# Allegro board PCB_3.brd
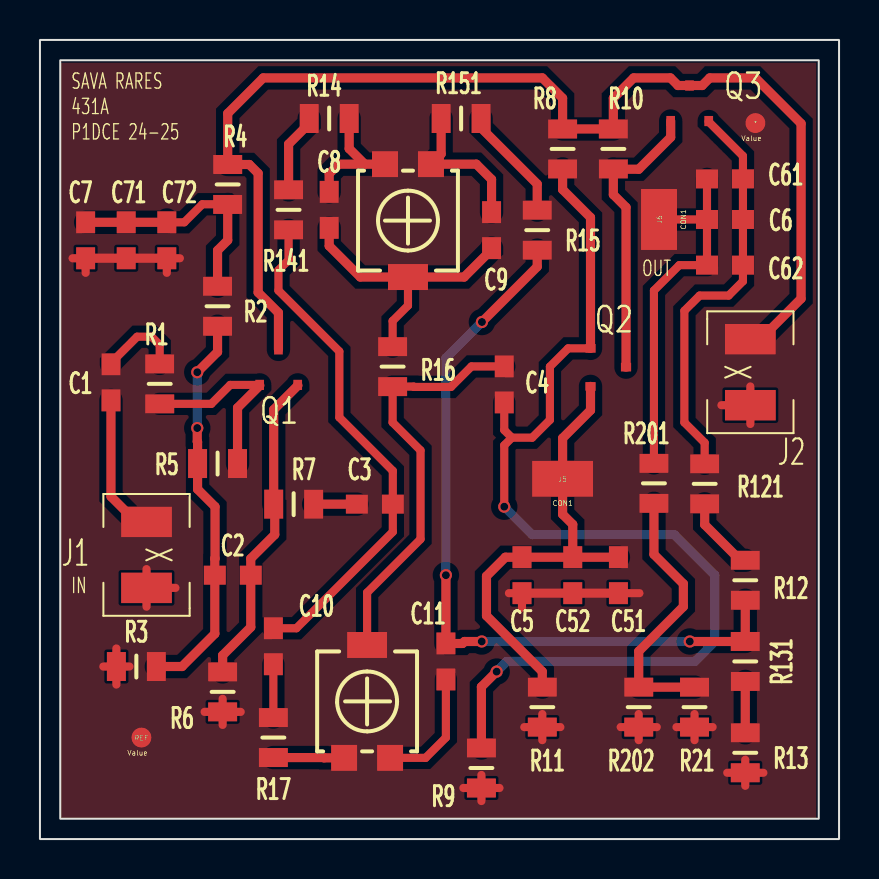
[diagram p0: board, top side]
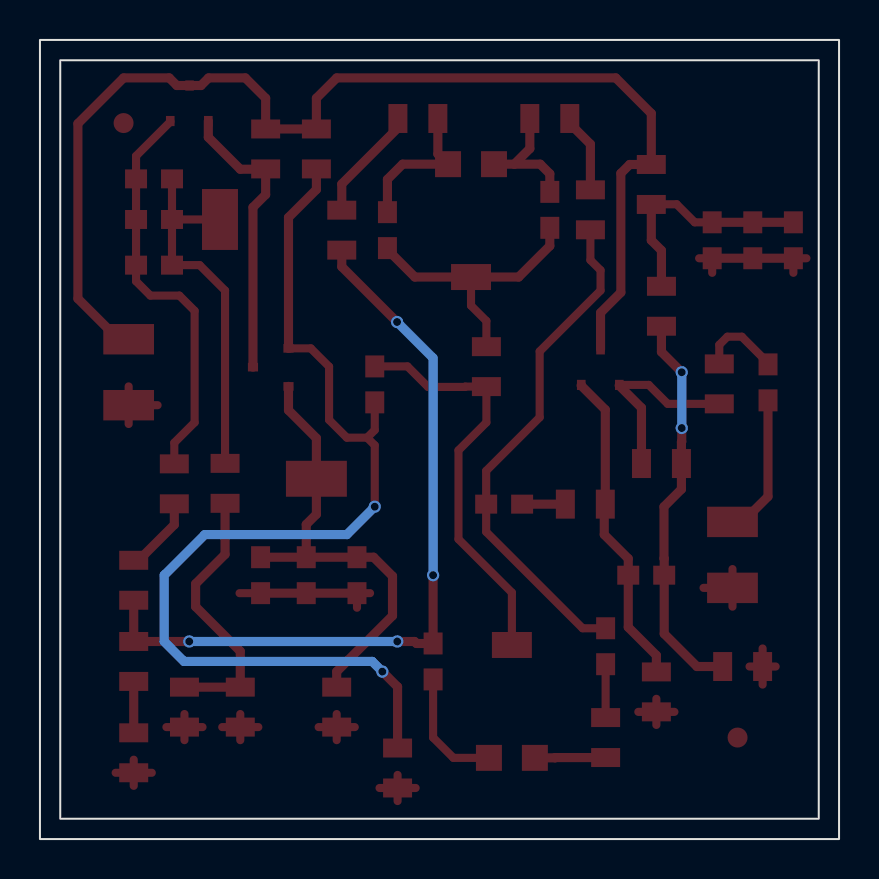
[diagram p1: board, bottom side, seen from below]

Outline 40 x 40 mm; copper layers: TOP, BOTTOM. Coordinates in mm from the lower left corner of the outline.
Outline path: rectangle 0,0 40,40 ; rectangle 1.02,1.02 38.98,38.98

## Design rules (mm)
nets with their own width: min track width 0.406; nets 0 N56090 N56126 N56242 N56314 N56322 N56482 N56488 N56498 N56510 N56530 N56568 N56596 N56804 N56814 N56820 N56830 N56910 N56918 N57098 N57226 N57232 N57238 N59984 N563521 N564261 N568981 N569300

## Placement (name value [footprint] x y rotation side)
C1  100n  [CAPC2008X126N_0805]  3.56 22.86 90 top
C2  4.7u  [CAPC2008X126N_0805]  9.65 13.21 0 top
C3  4.7u  [CAPC2008X126N_0805]  16.76 16.76 0 top
C4  1u  [CAPC2008X126N_0805]  23.24 22.76 270 top
C5  4.7u  [CAPC2008X126N_0805]  24.13 13.21 90 top
C6  4.7u  [CAPC2008X126N_0805]  34.29 31.01 0 top
C7  4.7u  [CAPC2008X126N_0805]  2.29 29.97 270 top
C8  33n  [CAPC2008X126N_0805]  14.48 31.5 270 top
C9  33n  [CAPC2008X126N_0805]  22.61 30.48 90 top
C10  2.2n  [CAPC2008X126N_0805]  11.68 9.65 270 top
C11  2.2n  [CAPC2008X126N_0805]  20.32 8.89 90 top
C51  2.2u  [CAPC2008X126N_0805]  28.96 13.21 90 top
C52  4.7u  [CAPC2008X126N_0805]  26.67 13.21 90 top
C61  4.7u  [CAPC2008X126N_0805]  34.29 33.05 0 top
C62  2.2u  [CAPC2008X126N_0805]  34.29 28.73 0 top
C71  4.7u  [CAPC2008X126N_0805]  4.32 29.97 270 top
C72  4.7u  [CAPC2008X126N_0805]  6.35 29.97 270 top
J1  CON2  [1210RF_WV_12D]  5.33 14.22 270 top
J2  CON2  [1210RF_WV_12D]  35.56 23.37 90 top
J5  CON1  [SMD_PAD_3-05_1-80]  26.16 18.03 0 top
J6  CON1  [SMD_PAD_3-05_1-80]  30.99 31.01 90 top
NOREF  -  [unnamed]  5.08 5.08 0 top
NOREF#2  -  [unnamed]  35.81 35.84 0 top
Q1  QBC846B  [SOT23]  11.94 23.62 90 top
Q2  QBC846B  [SOT23]  28.45 23.62 0 top
Q3  QBC846B  [SOT23]  32.51 36.83 90 top
R1  1k  [RES2012X50N_0805]  5.99 22.78 270 top
R2  100k  [RES2012X50N_0805]  8.89 26.67 90 top
R3  150k  [RES2012X50N_0805]  4.83 8.64 0 top
R4  22k  [RES2012X50N_0805]  9.4 32.77 270 top
R5  100k  [RES2012X50N_0805]  8.89 18.8 180 top
R6  5.6k  [RES2012X50N_0805]  9.14 7.37 270 top
R7  330  [RES2012X50N_0805]  12.7 16.76 0 top
R8  1Meg  [RES2012X50N_0805]  26.16 34.54 90 top
R9  180k  [RES2012X50N_0805]  22.1 3.56 90 top
R10  100k  [RES2012X50N_0805]  28.7 34.54 90 top
R11  22k  [RES2012X50N_0805]  25.15 6.6 90 top
R12  6.8k  [RES2012X50N_0805]  35.31 12.95 90 top
R13  2k  [RES2012X50N_0805]  35.31 4.32 90 top
R14  22k  [RES2012X50N_0805]  14.48 36.07 180 top
R15  10k  [RES2012X50N_0805]  24.89 30.48 90 top
R16  22k  [RES2012X50N_0805]  17.65 23.65 270 top
R17  2.2k  [RES2012X50N_0805]  11.68 5.08 270 top
R18  100K  [TS53YL]  17.27 33.78 90 top
R19  100K  [TS53YL]  17.53 4.06 270 top
R21  10Meg  [RES2012X50N_0805]  32.77 6.6 90 top
R121  510  [RES2012X50N_0805]  33.27 17.78 90 top
R131  330  [RES2012X50N_0805]  35.31 8.89 90 top
R141  10k  [RES2012X50N_0805]  12.45 31.5 270 top
R151  22k  [RES2012X50N_0805]  21.08 36.07 180 top
R201  510  [RES2012X50N_0805]  30.73 17.81 90 top
R202  510  [RES2012X50N_0805]  29.97 6.6 90 top

## Library data of the parts
C1-C11 C51 C52 C61 C62 C71 C72 = C
J1 J2 = CON2
J5 J6 = CON1
Q1 = QBC846B_0
Q2 = QBC846B_1
Q3 = QBC846B_2
R1-R17 R21 R121 R131 R141 R151 R201 R202 = R
R18 R19 = POT

## Footprints (pads in the part's own frame, mm; a bottom-side part is the same pattern mirrored in y, then rotated)
1210RF_WV_12D
  rect 1.524x2.54 smd: 1(-1.651,0) 2(1.651,0)
CAPC2008X126N_0805
  rect 1.1x0.95 smd: 1(-0.9,0) 2(0.9,0)
RES2012X50N_0805
  rect 0.95x1.45 smd: 1(-1,0) 2(1,0)
SMD_PAD_3-05_1-80
  rect 3.05x1.8 smd: 1(0,0)
SOT23
  rect 0.508x0.432 smd: 1(-0.889,0.94) 2(-0.889,-0.965) 3(0.889,0)
TS53YL
  rect 1.3x1.3 smd: 1(0,0) 3(0,-2.3)
  rect 1.3x2 smd: 2(-5.65,-1.15)
unnamed
  round 1 smd: 1(0,0)

## Nets
0: C5.1 C7.2 C51.1 C52.1 C71.2 C72.2 J1.2 J2.1 R3.1 R6.2 R9.1 R11.1 R13.1 R21.1 R202.1
N56090: C7.1 C71.1 C72.1 R2.2 R4.2
N56126: J2.2 Q1.3 Q3.3 R4.1 R8.2 R10.2
N56242: Q2.3 Q3.1 R10.1
N56314: C6.2 C61.2 C62.2 Q3.2(E) R121.2
N56322: C6.1 C61.1 C62.1 J6.1 R201.2
N56482: C3.2 C10.1 R141.2
N56488: C8.1 R14.1 R18.1
N56498: C9.2 R18.3 R151.2
N56510: C11.2 R12.1 R15.1 R131.2
N56530: C4.2 Q2.1 R8.1 R9.2
N56568: C8.2 C9.1 R16.1 R18.2(T)
N56596: C2.1 R2.1 R3.2 R5.2
N56804: C1.1 J1.1
N56814: C1.2 R1.1
N56820: Q1.1 R1.2 R5.1
N56830: C4.1 R16.2 R19.2(T)
N56910: C2.2 Q1.2(E) R6.1 R7.1
N56918: C5.2 C51.2 C52.2 J5.1 Q2.2(E) R11.2
N57098: R21.2 R201.1 R202.2
N57226: C10.2 R17.1
N57232: R17.2 R19.3
N57238: C11.1 R19.1
N59984: R13.2 R131.1
N563521: R14.2 R141.1
N564261: R15.2 R151.1
N568981: R12.2 R121.1
N569300: C3.1 R7.2

Pads without a net: NOREF 1; NOREF#2 1

## Via types
v1: diameter 0.61, hole 0.4, TOP to BOTTOM, 8 vias

## Routing (per net, layer and track width the routed paths; a pad name or vN(x,y) marks a point on that pad's centre or on a via; arc(x,y) is an arc through that point)
0: length 44.3
  TOP w0.406: J2.1 35.56,22.66 ; J2.1 34.11,21.72 ; J2.1 35.56,20.78 ; R11.1 26.05,5.6 ; R11.1 25.15,6.26 ; R11.1 24.24,5.6 ; R11.1 25.15,4.95 ; 3.83,7.73 R3.1 ; R3.1 3.83,9.54 ; R3.1 4.48,8.64 ; R3.1 3.17,8.64 ; R9.1 23,2.56 ; R9.1 22.1,1.9 ; R9.1 21.19,2.56 ; R9.1 22.1,3.21 ; 35.31,2.66 R13.1 ; R13.1 36.21,3.32 ; R13.1 34.4,3.32 ; R13.1 35.31,3.97 ; 23.48,12.31 C5.1 24.13,11.58 ; J1.2 6.78,12.57 ; J1.2 5.33,13.51 ; J1.2 5.33,11.63 ; 6.35,28.34 C72.2 7,29.07 ; 1.63,29.07 C7.2 2.29,28.34 ; 29.97,4.95 R202.1 ; R202.1 30.88,5.6 ; R202.1 29.07,5.6 ; R202.1 29.97,6.26 ; R21.1 33.67,5.6 ; R21.1 32.77,4.95 ; R21.1 32.77,6.26 ; R21.1 31.86,5.6 ; 4.45,12.57 4.83,12.57 ; R6.2 10.05,6.37 ; R6.2 8.24,6.37 ; R6.2 9.14,7.02 ; R6.2 9.14,5.71 ; C51.1 30.01,12.31
  TOP w0.457: 4.83,12.57 J1.2 ; C7.2 C71.2 C72.2 ; C51.1 C52.1 C5.1 ; 36.45,21.72 J2.1
N56090: length 11.9
  TOP w0.406: C72.1 7.22,30.87 8.13,31.78 9.39,31.78 R4.2
  TOP w0.457: R2.2 8.89,29.46 9.4,29.97 R4.2 ; C7.1 C71.1 C72.1 6.35,30.99
N56126: length 60.3
  TOP w0.457: J2.2 36.07,25.02 38.1,27.05 38.1,35.81 35.81,38.1 33.53,38.1 33.15,37.72 Q3.3 31.94,37.72 31.56,38.1 29.72,38.1 28.7,37.08 R10.2 R8.2 26.16,37.08 25.15,38.1 11.18,38.1 9.4,36.32 R4.1 10.48,33.77 10.92,33.32 10.92,27.36 11.94,26.34 Q1.3
N56242: length 14.5
  TOP w0.457: Q2.3 29.34,31.62 28.7,32.26 R10.1 28.72,33.53 29.97,33.53 31.57,35.13 Q3.1
N56314: length 20.4
  TOP w0.406: R121.2 33.27,19.84 32.26,20.85 32.26,26.44 33.02,27.2 34.47,27.2 35.19,27.92 C62.2 C6.2 C61.2 35.19,34.19 33.48,35.9 Q3.2
N56322: length 18.6
  TOP w0.406: C6.1 C62.1 32,28.73 30.73,27.46 R201.2 ; C6.1 C61.1 ; C6.1 J6.1
N56482: length 25.7
  TOP w0.406: R141.2 12.45,28.98 11.94,28.47 11.94,27.46 14.99,24.41 14.99,21.11 17.66,18.43 C3.2 17.66,15.38 12.84,10.55 C10.1
N56488: length 6.5
  TOP w0.457: R14.1 15.48,34.56 16.26,33.78 ; C8.1 14.48,33.3 14.96,33.78 16.26,33.78 ; 16.26,33.78 R18.1
N56498: length 7.5
  TOP w0.457: R151.2 20.08,34.29 R18.3 21.84,33.78 22.61,33.02 C9.2
N56510: length 38.7
  TOP w0.457: v1(20.32,13.21) C11.2 21.15,9.79 21.25,9.89 v1(22.11,9.89) ; R12.1 R131.2 v1(32.53,9.89) ; v1(22.12,25.88) 24.89,28.65 R15.1
  BOTTOM w0.457: v1(20.32,13.21) 20.32,24.08 v1(22.12,25.88) ; v1(22.11,9.89) v1(32.53,9.89)
N56530: length 53.4
  TOP w0.406: 23.62,20.09 24.64,20.09 25.53,20.98 25.53,23.65 26.44,24.56 Q2.1 ; 23.62,20.09 23.24,19.71 v1(23.24,16.64) ; 23.62,20.09 23.24,20.47 C4.2
  TOP w0.457: Q2.1 27.56,31.12 26.16,32.51 R8.1 ; v1(22.86,8.38) 22.1,7.62 R9.2
  BOTTOM w0.457: v1(23.24,16.64) 24.64,15.24 31.75,15.24 33.78,13.21 33.78,9.89 32.79,8.89 23.37,8.89 v1(22.86,8.38)
N56568: length 14.1
  TOP w0.406: R18.2 18.42,26.7 17.65,25.93 R16.1
  TOP w0.457: C8.2 14.48,29.69 16.04,28.13 R18.2 21.23,28.13 22.61,29.5 C9.1
N56596: length 19.8
  TOP w0.457: R2.1 8.89,24.38 v1(7.87,23.37) ; R3.2 7.11,8.64 8.75,10.28 C2.1 8.75,14.04 8.76,14.05 8.76,16.64 7.89,17.51 R5.2 7.89,19.88 7.87,19.89 v1(7.87,20.57)
  BOTTOM w0.457: v1(7.87,23.37) v1(7.87,20.57)
N56804: length 7.1
  TOP w0.457: C1.1 3.56,17.14 4.83,15.88 J1.1
N56814: length 4.2
  TOP w0.406: R1.1 5.99,24.74 5.59,25.15 4.87,25.15 3.56,23.84 C1.2
N56820: length 9.8
  TOP w0.406: R1.2 8.58,21.78 9.53,22.73 Q1.1
  TOP w0.457: R5.1 9.89,21.59 11,22.69 Q1.1
N56830: length 20.6
  TOP w0.406: R19.2 16.38,12.34 19.05,15.01 19.05,19.46 17.65,20.85 R16.2 18.71,22.65 18.72,22.63 20.57,22.63 21.6,23.66 C4.1
N56910: length 16
  TOP w0.457: R6.1 9.14,9.2 10.55,10.6 C2.2 10.55,14.04 11.75,15.24 11.75,16.71 R7.1 11.7,21.49 12.9,22.69 Q1.2
N56918: length 23
  TOP w0.457: C52.2 26.67,15.75 26.16,16.26 J5.1 26.16,20.07 27.56,21.46 Q2.2 ; C52.2 C5.2 23.3,14.11 22.35,13.16 22.35,11.18 25.15,8.38 R11.2 ; C52.2 C51.2
N57098: length 13.5
  TOP w0.457: R21.2 R202.2 29.97,9.4 32.21,11.63 32.21,12.78 30.73,14.25 R201.1
N57226: length 2.7
  TOP w0.406: C10.2 R17.1
N57232: length 3.5
  TOP w0.457: R17.2 14.2,4.08 14.22,4.06 R19.3
N57238: length 6.1
  TOP w0.406: R19.1 19.3,4.06 20.32,5.08 C11.1
N59984: length 2.6
  TOP w0.457: R13.2 R131.1
N563521: length 4
  TOP w0.457: R14.2 13.48,35.82 12.45,34.79 R141.1
N564261: length 5.8
  TOP w0.457: R15.2 24.89,32.79 22.08,35.6 R151.1
N568981: length 3.8
  TOP w0.457: R12.2 35.06,13.95 33.27,15.74 R121.1
N569300: length 2.2
  TOP w0.457: R7.2 C3.1

## Copper pours and planes (outline as drawn; the poured copper is in the pictures)
0 on TOP: 1.02,1.02 1.02,38.86 38.86,38.86 38.86,1.02

## Text on the board
User.Comments: STACKUP TABLE | Unit = Mils | # | 1 | 2 | NAME | TOP | BOTTOM | TYPE | SURFACE | CONDUCTOR | DIELECTRIC | MATERIAL | AIR | COPPER | FR-4 | TOTAL THICKNESS | THICKNESS | 0 | 0.7 | 63 | 64.4 | TOLERANCE | +0/-0
Ref Des/Silkscreen Top: SAVA RARES | 431A | P1DCE 24-25 | IN | OUT
XSECTION_CHART: *  SURFACE - AIR | L1 TOP CONDUCTOR - COPPER | *  DIELECTRIC - FR-4 | L2 BOTTOM CONDUCTOR - COPPER | DESIGN CROSS SECTION CHART | ___________________________ | TOTAL THICKNESS 64.4 MIL | 1-2
DISPLAY_TOP: FIGURE | FINISHED_SIZE | 15.75 | DRILL CHART: TOP to BOTTOM | ALL UNITS ARE IN MILS | PLATED | QTY | 8
